# Altium PCB PCB_layout.PcbDoc
Units mm, origin at the board's own origin, x right, y up, seen from the top; angles counter-clockwise.
Board outline 96.77 x 49.28 mm, 2 copper layers (Top Layer, Bottom Layer), stack 1.1 mm thick; 25 components, 18 nets, 71 pads, 4 vias.
Unrouted connection lines stored in the file: 1.
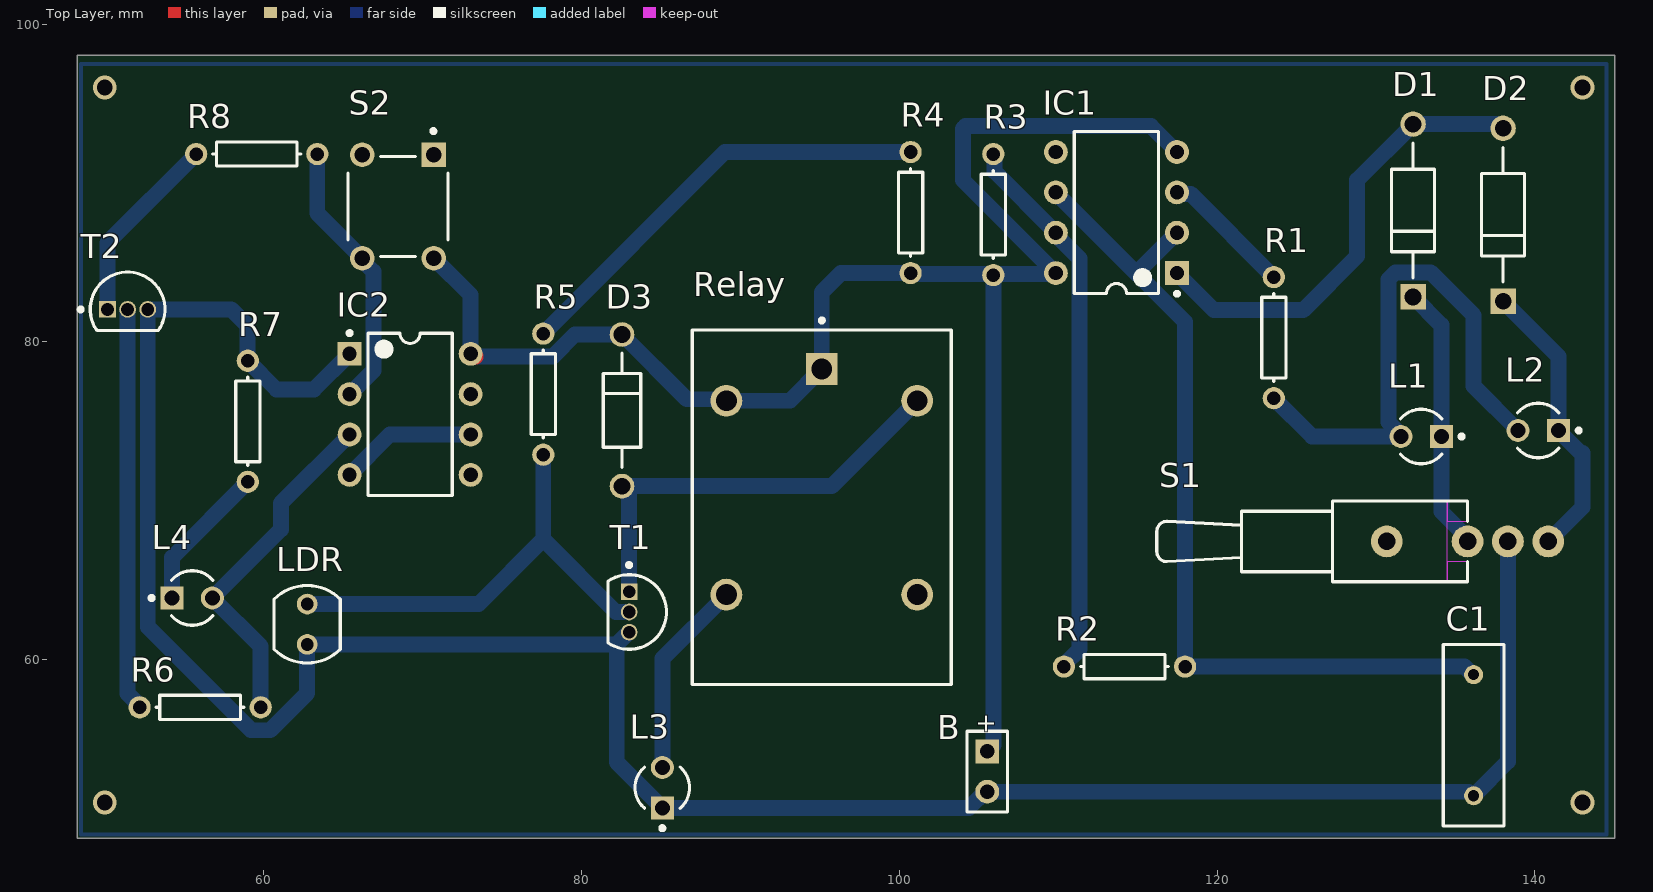
[diagram p0: Top Layer view]
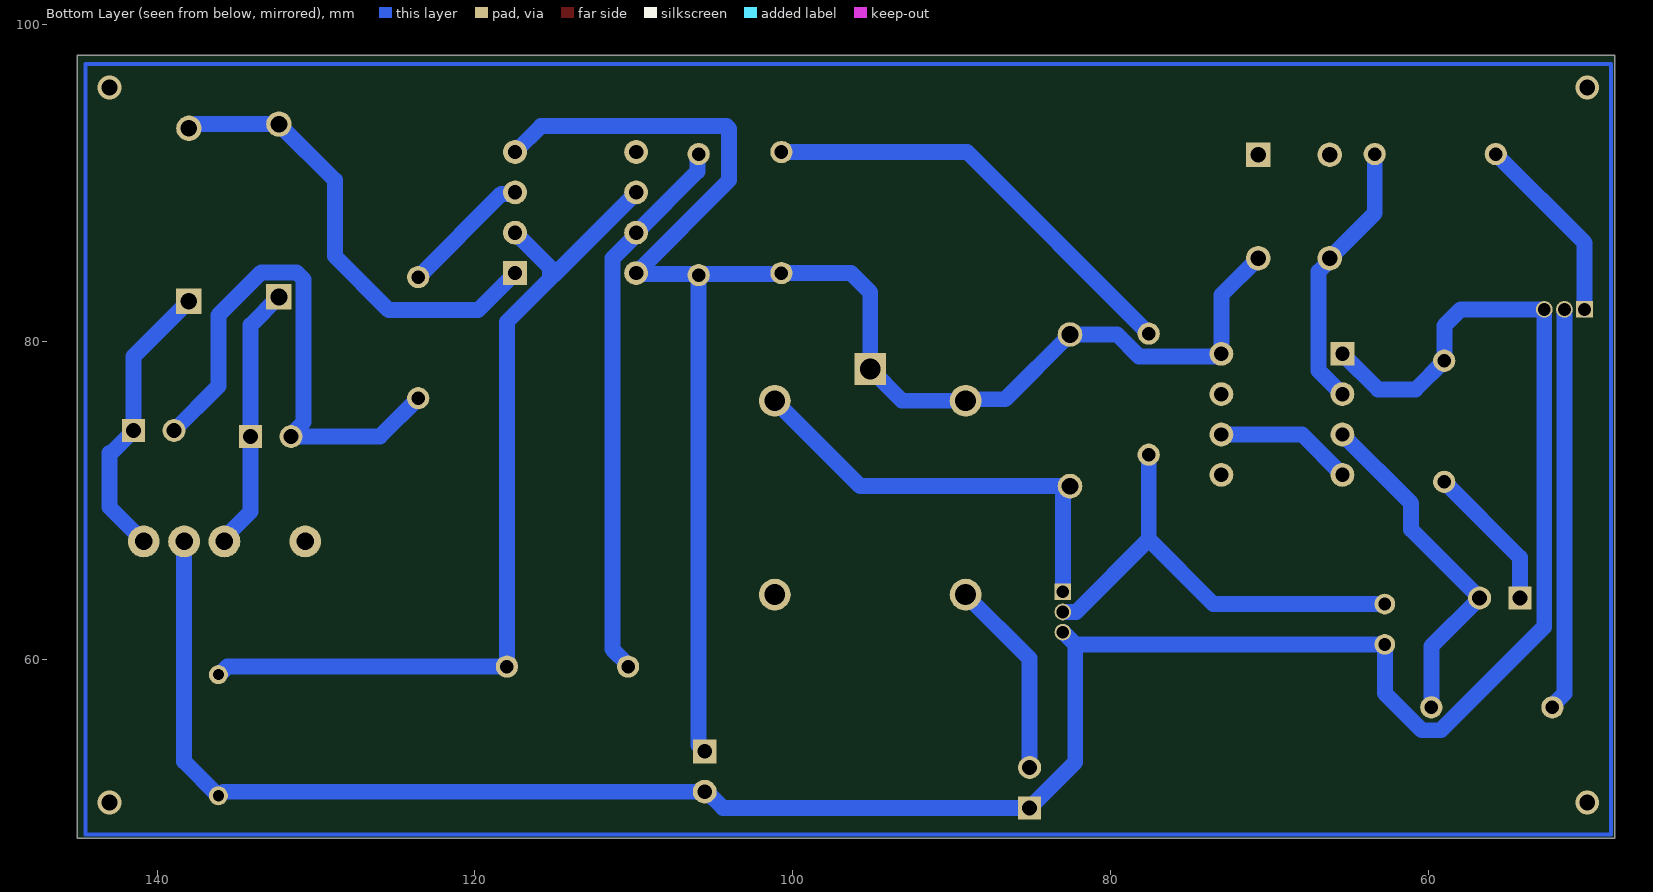
[diagram p1: Bottom Layer view, seen from below]

## Layer stack, top to bottom
Top Solder: solder mask 0.05, SM-001, Dk 4
Top Layer: signal copper 0.1
Dielectric 1: dielectric 0.9, FR-4, Dk 4.8
Bottom Layer: signal copper 0.1
Bottom Solder: solder mask 0.05, SM-001, Dk 4

## Board outline
48.26,48.768 145.034,48.768 145.034,98.044 48.26,98.044

## Design rules (kind name [scope] priority, off if disabled: settings)
Clearance [All] p1: gap=0.245 ignorepadtopadclearanceinfootprint=FALSE
PolygonConnect [All] p1: connectstyle=Relief reliefconductorwidth=0.254 reliefentries=4 polygonreliefangle="90 Angle" airgapwidth=0.254
RoutingVias [All] p1: holewidth=0.85 width=1 viastyle="Through Hole" minholewidth=0.85 minwidth=1 maxholewidth=0.85 maxwidth=1
SolderMaskExpansion [All] p1: expansion=0.102 istentingtop=FALSE
Width [All] p1: maxlimit=1 minlimit=0.254 preferedwidth=1
30 further rules are at their usual default settings.

## Components (designator, comment, footprint, x,y, rotation, side; value= is the part's Value field where it differs from the comment)
B "Battery" BAT-2 105.537,52.959 r270 top
C1 "Cap" RAD-0.3 136.144,55.245 r90 top value=100pF
D1 "1N4007-E3/54" FP-1N4007-MFG 132.334,88.265 r90 top value=15pF
D2 "1N4007-E3/54" FP-1N4007-MFG 138,88 r90 top value=15pF
D3 "1N4001" ONSC-AXIAL_LEAD-2-59-10_P 82.55,75.692 r270 top
IC1 "NE555P" P0008A 113.665,88.138 r180 top
IC2 "NE555P" P0008A 69.215,75.438 r0 top
L1 "HLMP-1719" FP-HLMP-1719-MFG 132.842,74.041 r180 top
L2 "HLMP-1719" FP-HLMP-1719-MFG 140.208,74.422 r180 top
L3 "HLMP-1719" FP-HLMP-1719-MFG 85.09,51.943 r90 top
L4 "HLMP-1719" FP-HLMP-1719-MFG 55.499,63.881 r0 top
LDR "VT90N1" EXCE-VT90N1 62.738,62.23 r90 top
R1 "Res1" AXIAL-0.3 123.571,80.264 r90 top value=180
R2 "Res1" AXIAL-0.3 114.173,59.563 r180 top value=470K
R3 "Res1" AXIAL-0.3 105.918,88.011 r270 top value=100K
R4 "Res1" AXIAL-0.3 100.711,88.138 r270 top value=10K
R5 "Res1" AXIAL-0.3 77.597,76.708 r90 top value=100K
R6 "Res1" AXIAL-0.3 56,57 r180 top value=10K
R7 "Res1" AXIAL-0.3 59,75 r270 top value=270
R8 "Res1" AXIAL-0.3 59.563,91.821 r180 top value=10K
Relay "JS1F-12V-F" FP-JS1F-12V-F-MFG 95.123,69.596 r270 top
S1 "SW-SPDT" TL36WW15050 135.763,67.437 r180 top
S2 "3-1825910-1" FP-3-1825910-1-MFG 68.453,88.519 r270 top
T1 "BC547B" ONSC-TO-92-3-29-11 83,63 r270 top
T2 "BC547B" ONSC-TO-92-3-29-11 51.435,82.042 r0 top

## Footprints (in the part's own frame and the unit in brackets; to place one, negate y for a bottom-side part, rotate by r counter-clockwise, add the part's x,y. Pads: shape width x height; smd on the part's side, far side on the other; paste and mask are expansions set on the pad)
AXIAL-0.3 [mm] "Axial Device, Thru-Hole; 2 Leads; 0.3 in Pin Spacing"
  round 1.4 hole 0.85: 1(-3.81,0) 2(3.81,0)
  silkscreen extent -2.77,-0.76 2.77,0.76
BAT-2 [mm] "Battery; 2 Leads"
  rect 1.5x1.5 hole 0.9: 1(-1.27,0)
  round 1.5 hole 0.9: 2(1.27,0)
  silkscreen extent -2.54,-1.27 2.54,1.27
EXCE-VT90N1 [mm] "THD, 2-Leads, Body Width 4.17mm (Max), Height 2.29mm"
  round 1.3 hole 0.8: 1(-1.27,0) 2(1.27,0)
  silkscreen extent -2.44,-2.08 2.44,2.08, body extent -2.44,-2.09 2.44,2.09, height 2.29
FP-1N4007-MFG [mm]
  rect 1.6x1.6 hole 1.05 paste-1000 mask+0: 1(-5.438,0)
  round 1.6 hole 1.05 paste-1000 mask+0: 2(5.438,0)
  silkscreen extent -4.24,-1.35 4.24,1.35, body extent -6.34,-1.45 6.34,1.45, height 0.25
FP-3-1825910-1-MFG [mm]
  rect 1.54x1.54 hole 0.99 paste-1000 mask+0: 1(-3.25,2.25)
  round 1.54 hole 0.99 paste-1000 mask+0: 2(3.25,2.25) 3(-3.25,-2.25) 4(3.25,-2.25)
  silkscreen extent -4.87,-3.14 3.14,3.14, body extent -4.12,-3.24 4.12,3.24, height 0.25
FP-HLMP-1719-MFG [mm]
  rect 1.45x1.45 hole 0.95 paste-1000 mask+0: 1(-1.27,0)
  round 1.45 hole 0.95 paste-1000 mask+0: 2(1.27,0)
  silkscreen extent -2.68,-1.71 1.3,1.71, body extent -2.22,-2.22 2.22,2.22, height 0.25
FP-JS1F-12V-F-MFG [mm]
  rect 2x2 hole 1.3 paste-1000 mask+0: 1(-8.7,0)
  round 2 hole 1.3 paste-1000 mask+0: 2(-6.7,-6) 3(5.5,-6) 4(5.5,6) 5(-6.7,6)
  silkscreen extent -11.87,-8.15 11.15,8.15, body extent -11.25,-8.25 11.25,8.25, height 0.25
ONSC-AXIAL_LEAD-2-59-10_P [mm] "AXIAL, 2-Leads, Diameter 2.35mm"
  round 1.55 hole 1.05: 1(-4.77,0) 2(4.77,0)
  silkscreen extent -3.6,-1.18 3.6,1.18
ONSC-TO-92-3-29-11 [mm] "TO, 3-Leads, Body Dia 4.7mm, Pitch 1.27mm"
  rect 1.05x1.05 hole 0.8: 1(-1.27,0)
  round 1.05 hole 0.8: 2(0,0) 3(1.27,0)
  silkscreen extent -3.07,-1.34 2.35,2.35, body extent -2.35,-1.33 2.36,2.36, height 7.87
P0008A [mm] "DIP, 8-Leads, Body 10.15x6.6mm, Pitch 2.54mm"
  rect 1.5x1.5 hole 0.9: 1(-3.81,3.81)
  round 1.5 hole 0.9: 2(-3.81,1.27) 3(-3.81,-1.27) 4(-3.81,-3.81) 5(3.81,-3.81) 6(3.81,-1.27) 7(3.81,1.27) 8(3.81,3.81)
  silkscreen extent -3.94,-5.1 2.65,5.23, body extent -3.95,-5.07 3.95,5.07, height 5.08
RAD-0.3 [mm] "Radial Cap, Thru-Hole; 2 Leads; 0.3 in Pin Spacing"
  round 1.2 hole 0.7: 1(-3.81,0) 2(3.81,0)
  silkscreen extent -5.71,-1.91 5.71,1.91
TL36WW15050 [mm] "Switch; 4 Leads"
  round 2 hole 1.1: 1(0,0) 2(-2.54,0) 3(-5.08,0) M(5.08,0)
  Top Layer keep-out region: 1.27,2.54 1.27,-2.54 8.509,-2.54 8.509,2.54
  Top Layer keep-out region: 0,2.54 0,1.27 1.27,1.27 1.27,2.54
  Top Layer keep-out region: 0,-1.27 0,-2.54 1.27,-2.54 1.27,-1.27
  silkscreen extent 0,-2.54 19.56,2.54

## Part data
B: "Multicell Battery", LatestRevisionDate=17-Jul-2002, LatestRevisionNote="Re-released for DXP Platform.", PackageDescription="Battery; 2 Leads", PackageReference=BAT-2, Published=24-Mar-1999, Publisher="Altium Limited"
C1: "Capacitor", LatestRevisionDate=17-Jul-2002, LatestRevisionNote="Re-released for DXP Platform.", PackageDescription="Radial Cap, Thru-Hole; 2 Leads; 0.3 in Pin Spacing", PackageReference=RAD-0.3, Published=8-Jun-2000, Publisher="Altium Limited"
D1 D2: library part CMP-02540-000046-1, "DIODE GEN PURP 1KV 1A DO204AL", Capacitance=15pF, Forward Current=1A, Manufacturer=Vishay, Max Junction Temp=+150°C, Max Repetitive Reverse Voltage=1000V, Max Surge Forward Current=30A, Package=1N4007, Peak Reverse Current=30uA, Temperature="-50°C to +150°C", Temperature Range Low=-50°C, Automotive=No, Category=Diode, ComponentLink2Description=Datasheet, ComponentLink2URL=http://www.vishay.com/docs/88503/1n4001.pdf, Device Class L1="Discrete Semiconductors", Device Class L2=Diodes, Device Class L3="Rectifier Diodes", Digikey Description="DIODE GEN PURP 1KV 1A DO204AL", Height=2.7mm, Ipc Land Pattern Name=DIOPA1088W105L520D270, Lead Free=Yes, Manufacturer Part Number=1N4007-E3/54, Mouser Description="Rectifiers Vr/1000V Io/1A", Octopart=https://octopart.com/1n4007-e3%2F54-vishay-39548207, RoHS=TRUE, Temperature Range High=+150°C
D3: library part CMP-0902-00117-1, "Standard Recovery Rectifier, 2-Pin Axial_Lead, Pb-Free, Bulk Bag", Manufacturer="On Semiconductor", ComponentLink1Description="Manufacturer URL", ComponentLink1URL=http://www.onsemi.com/, ComponentLink2Description=Datasheet, ComponentLink2URL=http://www.onsemi.com/pub_link/Collateral/1N4001-D.PDF, ComponentLink3Description="Package Specification", ComponentLink3URL=http://www.onsemi.cn/pub_link/Collateral/59-10.PDF, DatasheetVersion="Rev. 13", IFSM Max (A)=30, IO(rec) Max (A)=1, Mounting Technology="Through Hole", PackageDescription="2-Pin, Axial Lead, Diameter 2.35 mm", PackageReference=AXIAL_LEAD-2-59-10, PackageVersion="Rev. U, 02/2005", Packing="Bulk Bag", PartNumber=1N4001, RoHS=TRUE, Type="Standard Recovery", VRRM Max (V)=50
IC1 IC2: library part CMP-2000-04954-1, "Precision Timer, 4.5 to 16 V, 0 to 70 degC, 8-Pin DIP, Pb-Free, Tube", Manufacturer=TexasInstruments, Maximum High Level Output Current=-200mA, Maximum Low Level Output Current=200mA, Operating Supply Voltage=5, Package=8PDIP, Package Description="8-Pin Double In-line Package, Body 9.59 x 6.35 mm, Pitch 2.54 mm", Package Reference=P8, Category=Timer, Datasheet URL=http://www.ti.com/general/docs/lit/getliterature.tsp?genericPartNumber=NE555&fileType=pdf, Datasheet Version="Rev. I, 09/2014", Manufacturer URL=http://www.ti.com/, Number of Internal Timers=1, Package URL=http://www.ti.com/lit/ml/mpdi001b/mpdi001b.pdf, Packaging=Rail/Tube, Rad Hard=No, Type=Standard
L1 L2 L3 L4: library part CMP-2000-06410-2, "LED YELLOW DIFFUSED T-1 T/H", Colour=Yellow, Forward Current=2mA, Forward Voltage=1.8V, Manufacturer=Broadcom, Package=0, Power Dissipation=17.5mW, Reverse Voltage=5V, Temperature="-40°C to +100°C", Temperature Range High=+100°C, Temperature Range Low=-40°C, Automotive=No, Category=Diode, ComponentLink2Description=Datasheet, ComponentLink2URL=https://docs.broadcom.com/docs/AV02-1557EN, Device Class L1=Optoelectronics, Device Class L2=LEDs, Device Class L3=unset, Digikey Description="LED YELLOW DIFFUSED T-1 T/H", Lead Free=Yes, Led Orientation=Straight, Luminous Intensity=2.1mcd, Manufacturer Part Number=HLMP-1719, Mouser Description="Standard LEDs - Through Hole Yellow Diffused 585nm 2.1mcd", Octopart=https://octopart.com/hlmp-1719-broadcom-71130405, RoHS=TRUE, Viewing Angle=50°, Wavelength=585nm
LDR: library part CMP-2000-07406-1, "Photoconductive Resistor, 200 kOhm, 100 V, 80 mW, -40 to 75 degC, 2-Pin THD, RoHS", Dark Resistance=200kohm, Manufacturer="Excelitas Technology", Operating Temperature Max=75°C, Operating Temperature Min=-40°C, Package Description="2-Pin Through Hole Device, Body Width 4.17 mm (Max), Height 2.29 mm", Power Rating=80mW, Resistance @ Lux=12kohm, Resistor Case Style=-, Voltage Rating=100V, Datasheet URL=http://datasheet.octopart.com/VT90N1-Excelitas-datasheet-10388451.pdf, Datasheet Version=09/2006, Manufacturer URL=http://www.excelitas.com/Pages/Index.aspx, Mounting Technology=ThroughHole, Package Reference=VT90N1, Packaging=Each, Product Range=-, SVHC=Cadmiumchloride(15-Jun-2015)
R1 R2 R3 R4 R5 R6 R7 R8: "Resistor", LatestRevisionDate=17-Jul-2002, LatestRevisionNote="Re-released for DXP Platform.", PackageDescription="Axial Device, Thru-Hole; 2 Leads; 0.3 in Pin Spacing", PackageReference=AXIAL-0.3, Published=8-Jun-2000, Publisher="Altium Limited"
Relay: library part CMP-05607-000089-1, "RELAY GEN PURPOSE SPDT 10A 12V", Coil Current=30mA, Coil Power=360mW, Coil Resistance=400R, Coil Voltage (DC)=12V, Contact Current Rating=10A, Max Operating Temperature=70°C, Max Voltage Rating (AC)=250V, Max Voltage Rating (DC)=100V, Min Operating Temperature=-40°C, Package Quantity=100, Coil Type=Non-Latching, Contact Material=Silver, Depth=16mm, Length=22mm, Max Current Rating=10A, Mount="Through Hole", Number of Pins=5, Operate Time=10ms, Packaging=Bulk, Power Consumption=360mW, Radiation Hardening=No, Relay Type="General Purpose", Release Time=10ms, RoHS Compliant=Yes, Series=JS, Termination="PC Pin", Throw Configuration=SPDT, Voltage Rating (AC)=250V, Weight=12g
S1: "SPDT Subminiature Toggle Switch, Right Angle Mounting, Vertical Actuation", ComponentLink1Description="Manufacturer Link", ComponentLink1URL=http://www.apem.com, DatasheetVersion=05-Dec-2000, LatestRevisionDate=17-Dec-2003, LatestRevisionNote="Schematic revised, PCB Footprint replaced.", PackageDescription="Switch; 4 Leads", PackageReference=TL36WW15050, Published=24-Mar-1999, Publisher="Altium Limited"
S2: library part CMP-03407-000001-1, "SWITCH TACTILE SPST-NO 0.05A 24V", Contact Current Rating=50mA, Contact Resistance=100mΩ, Manufacturer="TE Connectivity", Operating Force=160gf, Package=0, Temperature="-35°C to +85°C", Temperature Range High=+85°C, Temperature Range Low=-35°C, Automotive=No, Category=Switch, ComponentLink2Description=Datasheet, ComponentLink2URL=https://www.te.com/commerce/DocumentDelivery/DDEController?Action=srchrtrv&DocNm=1825910&DocType=Customer+Drawing&DocLang=English, Device Class L1=Electromechanical, Device Class L2=Switches, Device Class L3="Tactile Switches", Digikey Description="SWITCH TACTILE SPST-NO 0.05A 24V", Electromechanical Life=100000Cycles, Height=17.3mm, Lead Free=Yes, Manufacturer Part Number=3-1825910-1, Mount="Through Hole", Octopart=https://octopart.com/3-1825910-1-te+connectivity-46506874, RoHS=TRUE, Throw Configuration=SPST-NO
T1 T2: library part CMP-1048-01467-1, "Amplifier Transistor, NPN Silicon, 3-Pin TO-92, Bulk Box", Manufacturer="On Semiconductor", ComponentLink1Description="Manufacturer URL", ComponentLink1URL=http://www.onsemi.com/, ComponentLink2Description=Datasheet, ComponentLink2URL=http://www.onsemi.com/pub_link/Collateral/BC546-D.PDF, ComponentLink3Description="Package Specification", ComponentLink3URL=http://www.onsemi.cn/pub_link/Collateral/2N6426-D.PDF, DatasheetVersion="Rev. 7", fT Min (MHz)=150, IC Continuous (A)=0.1, Mounting Technology="Through Hole", PackageDescription="3-Pin Transistor Outline, Body 4.825 x 3.685 mm, Pitch 1.27 mm", PackageReference=TO-92-3-29-11_AM_SL, PackageVersion="Rev. AM", Packing="Bulk Box", PartNumber=BC547B, Polarity=NPN, RoHS=FALSE

## Via types
v1: diameter 1.5, hole 1, Top Layer to Bottom Layer, 4 vias

## Nets (pads, with @x,y where several pads share a name; then routed paths per layer and width w, separated by ;. In a path a pad name is that pad's centre, name@x,y a point inside that pad or via, vN(x,y) a via of type N, cw(c..) or ccw(c..) an arc to the next point about the centre after c; other vN are vias at no path point)
GND: B.2 C1.1 IC2.1 L3.1 LDR.1 R7.1 S1.2 T1.3 T2.3 | length 154.5
  Top Layer w1: R7.1@58.99,78.82 R7.1 ; B.2@105.402,51.689 B.2 ; C1.1@136.09,51.435 C1.1
  Bottom Layer w1: R7.1@58.99,78.82 58.99,81.01 57.958,82.042 T2.3 52.705,62.061 59.211,55.555 60.409,55.555 62.738,57.884 LDR.1 82.216,60.96 ; R7.1 60.81,77 63.157,77 IC2.1 ; T1.3 82.986,61.73 82.216,60.96 ; S1.2 138.303,53.594 C1.1 136.09,51.435 135.836,51.689 B.2 105.402,51.689 104.386,50.673 L3.1 82.216,53.547 82.216,60.96
NetC1_2: C1.2 IC1.2 IC1.6 R2.1 | length 55.6
  Top Layer w1: IC1.2@117.379,86.772 IC1.2 IC1.2@117.461,86.868 ; C1.2@136.09,59.055 C1.2
  Bottom Layer w1: IC1.6 109.855,89.394 114.921,84.328 115.263,83.986 ; IC1.2 117.461,86.868 115.263,84.67 115.263,83.986 ; C1.2 136.09,59.055 135.582,59.563 R2.1 117.983,81.266 115.263,83.986
NetD1_1: D1.1 L1.1 S1.1 | length 17
  Top Layer w1: S1.1 S1.1@135.763,67.653
  Bottom Layer w1: D1.1 134.112,81.049 L1.1 134.112,69.322 135.763,67.671 S1.1
NetD1_2: D1.2 D2.2 IC1.1 | length 29.3
  Top Layer w1: D2.2@137.937,93.374 D2.2
  Bottom Layer w1: IC1.1 119.803,82 125.414,82 128.817,85.402 128.817,90.186 D1.2 137.573,93.703 137.838,93.438 D2.2
NetD2_1: D2.1 L2.1 S1.3 | length 18.1
  Bottom Layer w1: D2.1 141.478,79.084 L2.1 142.9,73 143,73 143,69.594 S1.3
NetD3_2: D3.2 Relay.5 T1.1 | length 27.6
  Bottom Layer w1: T1.1 83,70.323 82.55,70.773 D3.2 95.749,70.922 Relay.5
NetIC1_3: IC1.3 R1.2 | length 8.4
  Top Layer w1: IC1.3 IC1.3@117.571,89.312
  Bottom Layer w1: IC1.3 117.571,89.312 118.333,89.312 R1.2
NetIC1_7: IC1.7 R2.2 R3.1 | length 35.3
  Top Layer w1: R3.1 R3.1@105.995,91.744 ; IC1.7@109.72,86.868 IC1.7 IC1.7@109.951,86.772
  Bottom Layer w1: R3.1 105.995,91.744 105.995,90.728 IC1.7 109.855,86.733 111.35,85.238 111.35,60.658 110.363,59.671 R2.2
NetIC2_2: IC2.2 R8.1 S2.4 | length 17.3
  Top Layer w1: IC2.2 IC2.2@65.501,76.804
  Bottom Layer w1: R8.1 63.373,88.099 S2.4 66.203,85.123 66.9,84.426 66.9,78.189 65.419,76.708 IC2.2
NetIC2_3: IC2.3 L4.2 R6.1 | length 22.3
  Top Layer w1: L4.2 L4.2@56.855,63.967 ; IC2.3@65.27,74.168 IC2.3
  Bottom Layer w1: R6.1 59.81,60.84 L4.2 61.082,68.194 61.082,69.845 IC2.3
NetL1_2: L1.2 L2.2 R1.1 | length 34.3
  Bottom Layer w1: R1.1 125.984,74.041 L1.2 131.572,74.163 130.789,74.946 130.789,83.936 131.225,84.372 133.443,84.372 136.147,81.667 136.147,77.213 L2.2
NetL3_2: L3.2 Relay.3 | length 12.6
  Bottom Layer w1: L3.2 85.09,60.063 Relay.3
NetL4_1: L4.1 R7.2 | length 9.3
  Bottom Layer w1: L4.1 54.229,66.419 R7.2
NetLDR_2: LDR.2 R5.1 T1.2 | length 29.2
  Bottom Layer w1: LDR.2 73.528,63.5 77.597,67.569 ; R5.1 77.597,67.569 ; T1.2 82.166,63 77.597,67.569
NetR4_1: R4.1 R5.2 | length 27.8
  Bottom Layer w1: R5.2 89.027,91.948 R4.1
NetR6_2: R6.2 T2.2 | length 25.6
  Top Layer w1: R6.2@52.082,57 R6.2 R6.2@52.19,57.108
  Bottom Layer w1: T2.2 51.435,81.516 51.435,57.863 52.19,57.108 R6.2
NetR8_2: R8.2 T2.1 | length 12.1
  Bottom Layer w1: T2.1 50.165,86.233 R8.2
VCC: B.1 D3.1 IC1.4 IC1.8 IC2.4 IC2.6 IC2.8 R3.2 R4.2 Relay.1 Relay.2 S2.2 | length 117.9
  Top Layer w1: IC2.8 73.16,79.248 IC2.8@73.335,79.073 ; Relay.2@89.03,76.389 Relay.2 ; R4.2@100.634,84.251 R4.2 R4.2@100.774,84.264 ; R3.2@105.855,84.264 R3.2 R3.2@105.981,84.264 ; IC1.8@109.791,84.264 IC1.8 ; IC1.4@117.34,91.948 IC1.4
  Bottom Layer w1: IC2.4 67.945,74.168 IC2.6 ; S2.2 73.025,82.947 IC2.8 ; IC2.8@73.335,79.073 78.196,79.073 79.585,80.462 D3.1 86.623,76.389 89.03,76.389 Relay.2 93.123,76.296 Relay.1 95.123,83.123 96.328,84.328 R4.2 100.774,84.264 105.855,84.264 R3.2 ; B.1 105.918,54.61 R3.2 ; IC1.4@117.379,91.852 IC1.4 115.837,93.586 104.172,93.586 104,93.414 104,90.183 IC1.8 109.791,84.264 105.981,84.264 R3.2
pads on no net: IC1.5 IC2.5 IC2.7 Relay.4 S1.M S2.1 S2.3
copper on no net: | length 289
  Bottom Layer w0.254: 48.5,49 48.5,97.5 144.5,97.5 144.5,49 48.5,49
  other v1: 50,51 143,51 50,96 143,96

## Text inside footprints (layer, text, board x,y; h text height)
B: Top Overlay "+" at 104.96,56.629 h1.15 r270